# Altium PCB solarInterface.PcbDoc
Units mil, origin at the board's own origin, x right, y up, seen from the top; angles counter-clockwise.
Board outline 4275 x 1970 mil, 2 copper layers (Top Layer, Bottom Layer); 58 components, 46 nets, 174 pads, 35 vias.
Unrouted connection lines stored in the file: 31.
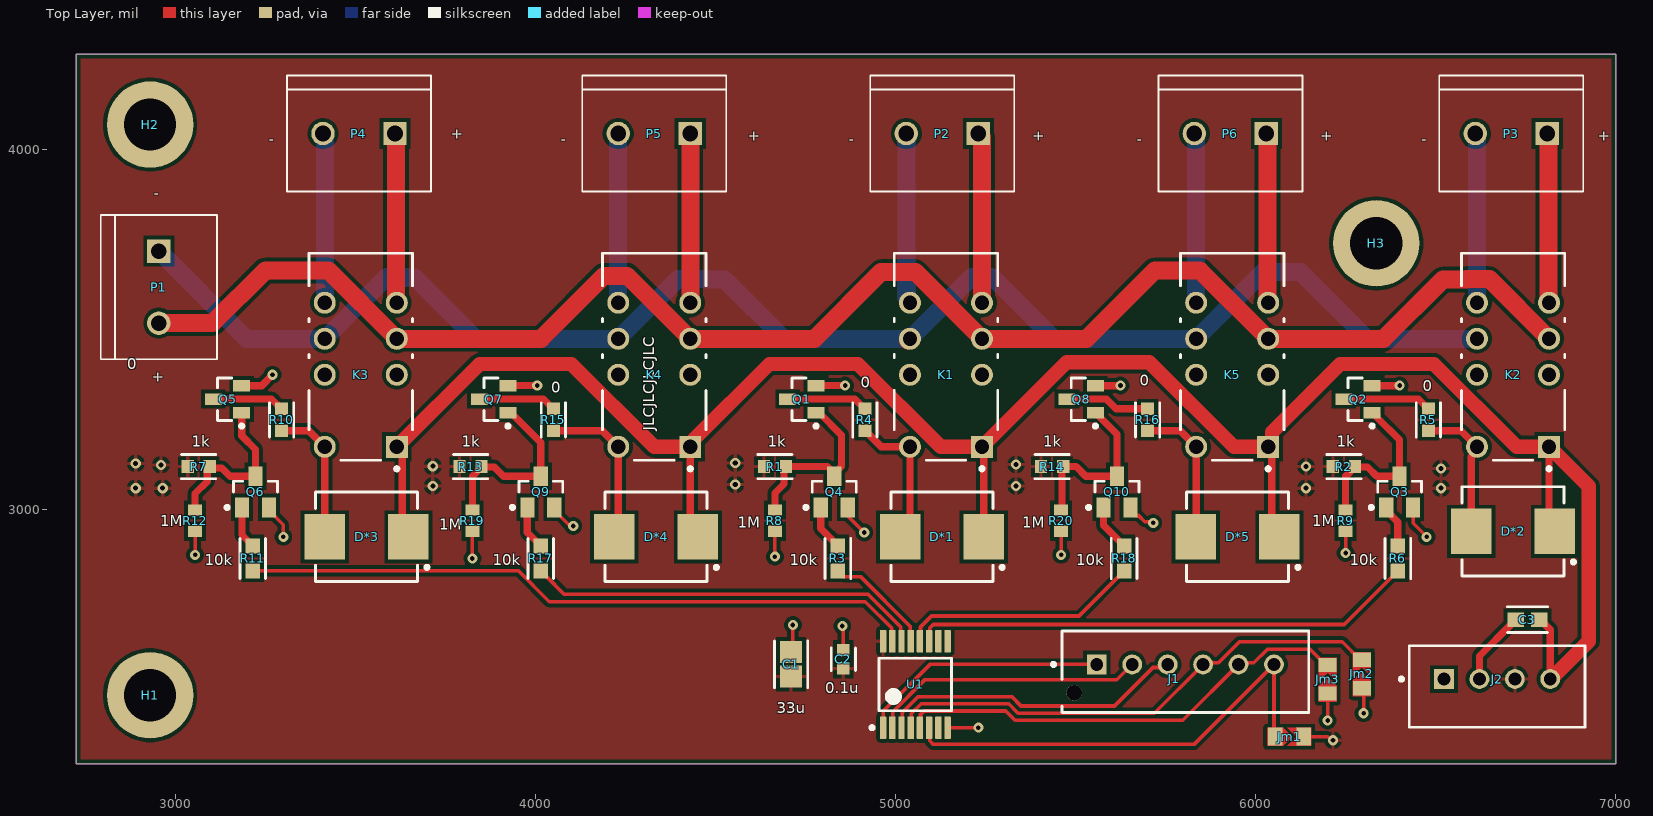
[diagram p0: Top Layer view]
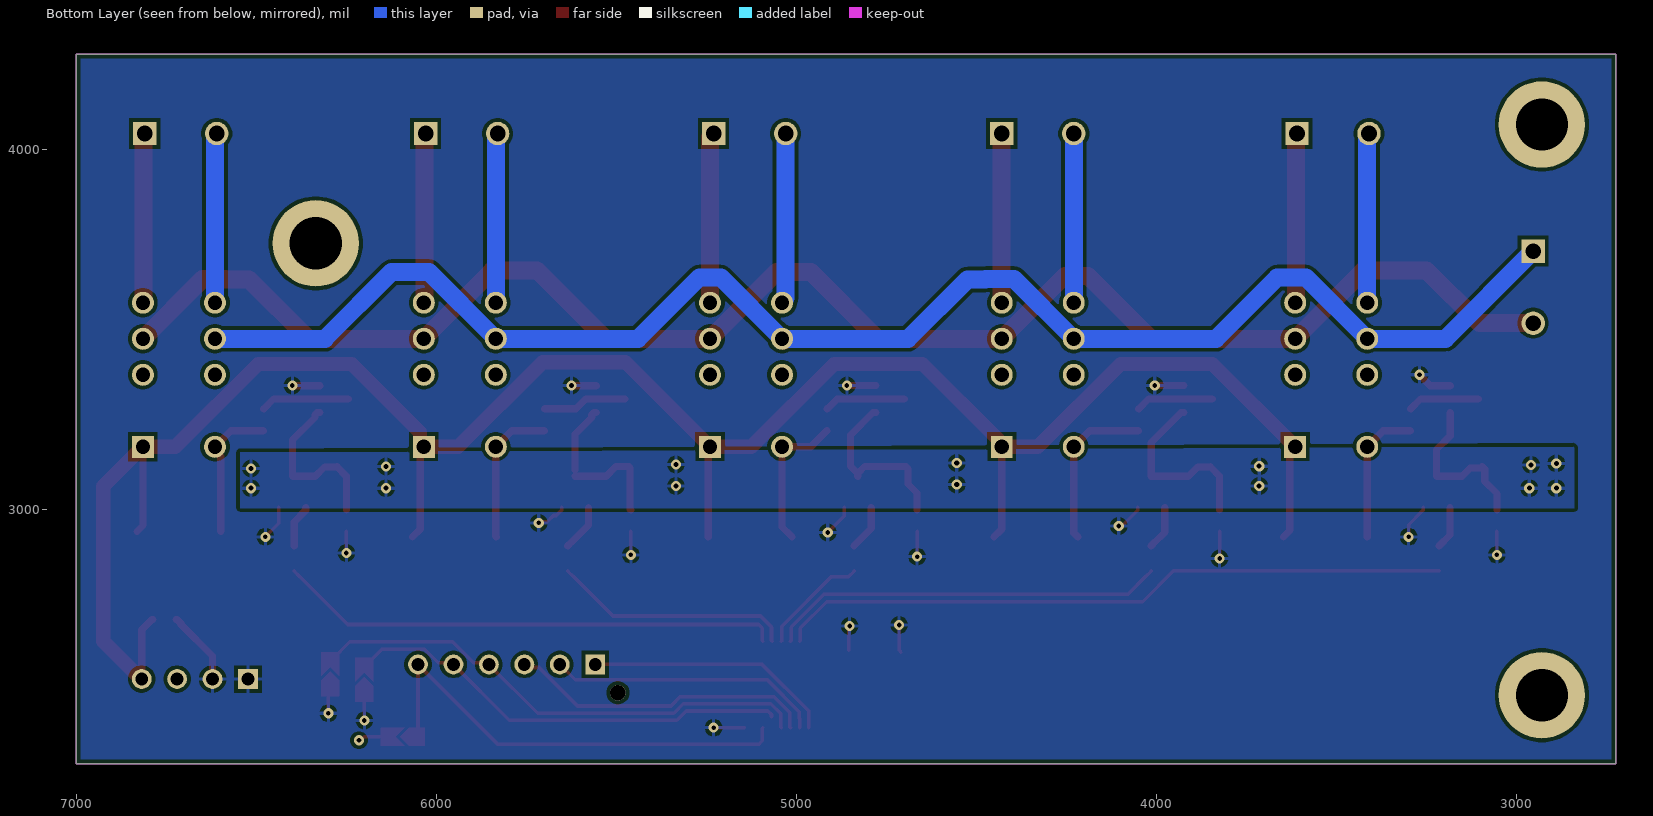
[diagram p1: Bottom Layer view, seen from below]
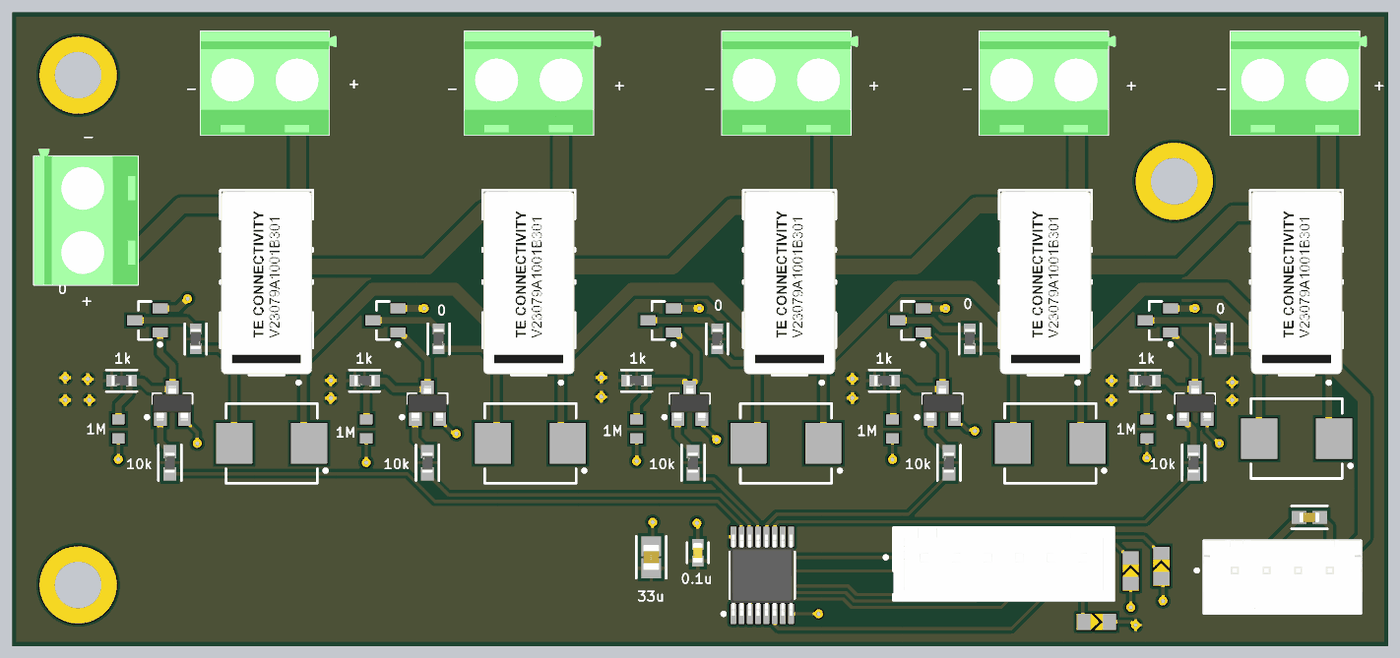
[diagram p2: 3D render of the assembled board from above, using the file's embedded part models]

## Layer stack, top to bottom
Top Solder: solder mask 0.4, Solder Resist, Dk 3.5
Top Layer: signal copper 1.4
Dielectric 1: dielectric 12.6, FR-4, Dk 4.8
Bottom Layer: signal copper 1.4
Bottom Solder: solder mask 0.4, Solder Resist, Dk 3.5

## Board outline
2725,2295 7000,2295 7000,4265 2725,4265

## Design rules (kind name [scope] priority, off if disabled: settings)
Clearance [All] p1: gap=10 ignorepadtopadclearanceinfootprint=TRUE except(0: Arc-Hole Track-Hole SMDPad-Hole THPad-Hole Via-Hole Fill-Hole Poly-Hole Region-Hole Text-Hole)
PolygonConnect [All] p1: connectstyle=Relief reliefconductorwidth=10 reliefentries=4 polygonreliefangle="90 Angle" airgapwidth=10
RoutingVias [All] p1: holewidth=13 width=28 viastyle="Through Hole" minholewidth=7 minwidth=10 maxholewidth=28 maxwidth=50
SolderMaskExpansion [All] p1: expansion=4 istentingtop=FALSE
Width [All] p1: maxlimit=75 minlimit=7 preferedwidth=10 minimp=50.000000 maximp=50.000000 favimp=50.000000
30 further rules are at their usual default settings.

## Components (designator, comment, footprint, x,y, rotation, side; value= is the part's Value field where it differs from the comment)
C1 "33u" FP-C2012-125-0_2-IPC_A 4710,2570.98 r90 top
C2 "0.1u" FP-C0603-CJ-MFG 4855,2585 r90 top value=100nF
C3 "GRM188R71C474KA88D" FP-GRM188-0_1-e0_2_0_5-IPC_A 6755,2695 r180 top
D*1 "Diode" DIOM6959X26M 5128.86,2925 r180 top
D*2 "Diode" DIOM6959X26M 6715,2940 r180 top
D*3 "Diode" DIOM6959X26M 3531.14,2925 r180 top
D*4 "Diode" DIOM6959X26M 4335,2925 r180 top
D*5 "Diode" DIOM6959X26M 5950,2925 r180 top
H1 "Mount_Holes" MountHole-4-40PTH 2930,2485 r90 top
H2 "Mount_Holes" MountHole-4-40PTH 2930,4070 r90 top
H3 "Mount_Holes" MountHole-4-40PTH 6335,3740 r90 top
J1 "B6B-XH-AM(LF)(SN)" FP-B6B-XH-AM_LF_SN-MFG 5805,2550 r180 top
J2 "B4B-XH-A(LF)(SN)" FP-B4B-XH-A_LF_SN-MFG 6670.79,2509.33 r180 top
Jm1 "SolderJumper" bridge 6090,2370 r0 top
Jm2 "SolderJumper" bridge 6295,2540 r90 top
Jm3 "SolderJumper" bridge 6200,2525 r90 top
K1 "V23079A1001B301" FP-V23079A1001B301-MFG 5140,3425 r90 top
K2 "V23079A1001B301" FP-V23079A1001B301-MFG 6715,3425 r90 top
K3 "V23079A1001B301" FP-V23079A1001B301-MFG 3515,3425 r90 top
K4 "V23079A1001B301" FP-V23079A1001B301-MFG 4330,3425 r90 top
K5 "V23079A1001B301" FP-V23079A1001B301-MFG 5935,3425 r90 top
P1 "282837-2" TE_282837-2 2954.22,3618.34 r270 top
P2 "282837-2" TE_282837-2 5130,4045 r180 top
P3 "282837-2" TE_282837-2 6710,4045 r180 top
P4 "282837-2" TE_282837-2 3510,4045 r180 top
P5 "282837-2" TE_282837-2 4330,4045 r180 top
P6 "282837-2" TE_282837-2 5930,4045 r180 top
Q1 "IRLML6344" SOT95P245X110-3N 4740,3307.4 r180 top
Q2 "IRLML6344" SOT95P245X110-3N 6284.37,3307.4 r180 top
Q3 "MMBT3904" FAIR-SOT23-3_V 6400,3050 r90 top
Q4 "MMBT3904" FAIR-SOT23-3_V 4830,3050 r90 top
Q5 "IRLML6344" SOT95P245X110-3N 3145,3307.4 r180 top
Q6 "MMBT3904" FAIR-SOT23-3_V 3222.6,3050 r90 top
Q7 "IRLML6344" SOT95P245X110-3N 3884.37,3307.4 r180 top
Q8 "IRLML6344" SOT95P245X110-3N 5515.63,3307.4 r180 top
Q9 "MMBT3904" FAIR-SOT23-3_V 4015,3050 r90 top
Q10 "MMBT3904" FAIR-SOT23-3_V 5615,3050 r90 top
R1 "1k" FP-RC0603-0_55-IPC_B 4665,3120 r180 top
R2 "1k" FP-RC0603-0_55-IPC_B 6245,3120 r180 top
R3 "10k" FP-RC0603-0_55-IPC_A 4840,2865 r90 top
R4 "0" FP-RC0603-0_55-IPC_B 4915,3250 r270 top
R5 "0" FP-RC0603-0_55-IPC_B 6480,3250 r270 top
R6 "10k" FP-RC0603-0_55-IPC_A 6395,2865 r90 top
R7 "1k" FP-RC0603-0_55-IPC_B 3065,3120 r180 top
R8 "1M" RESC1608X55X25ML10T15 4665,2970 r90 top
R9 "1M" RESC1608X55X25ML10T15 6250,2970 r90 top
R10 "0" FP-RC0603-0_55-IPC_B 3295,3250 r270 top
R11 "10k" FP-RC0603-0_55-IPC_A 3215,2865 r90 top
R12 "1M" RESC1608X55X25ML10T15 3055,2970 r90 top
R13 "1k" FP-RC0603-0_55-IPC_B 3820,3120 r180 top
R14 "1k" FP-RC0603-0_55-IPC_B 5435,3120 r180 top
R15 "0" FP-RC0603-0_55-IPC_B 4050,3250 r270 top
R16 "0" FP-RC0603-0_55-IPC_B 5700,3250 r270 top
R17 "10k" FP-RC0603-0_55-IPC_A 4015,2865 r90 top
R18 "10k" FP-RC0603-0_55-IPC_A 5635,2865 r90 top
R19 "1M" RESC1608X55X25ML10T15 3825,2970 r90 top
R20 "1M" RESC1608X55X25ML10T15 5460,2970 r90 top
U1 "SN74LVC138AQPWRQ1" PW0016A_M 5055,2515 r90 top

## Footprints (in the part's own frame and the unit in brackets; to place one, negate y for a bottom-side part, rotate by r counter-clockwise, add the part's x,y. Pads: shape width x height; smd on the part's side, far side on the other; paste and mask are expansions set on the pad)
bridge [mil]
  rect 40x50 smd: 1(-35,0) 2(44,0)
  Top Layer region: -58,-25 -13,-25 12,0 -13,25 -58,25
  Top Layer region: -2,-25 23,0 -2,25 64,25 64,-25
DIOM6959X26M [mm] "Molded Diode, 2-Leads, Body 6.9x5.9mm, IPC Low Density"
  rect 2.85x3.2 smd: AN(2.95,0) CAT(-2.95,0)
  silkscreen extent -4.38,-3.15 3.6,3.15, body extent -3.55,-3.11 3.56,3.11, height 2.62
FAIR-SOT23-3_V [mm] "SOT23, 3-Leads, Body 3.12x1.5mm, Pitch 0.95mm"
  rect 1.4x1 smd: 1(-1.1,0.95) 2(-1.1,-0.95) 3(1.1,0)
  silkscreen extent -1.22,-1.55 0.75,2.12, body extent -1.35,-1.56 1.35,1.56, height 1.2
FP-B4B-XH-A_LF_SN-MFG [mm]
  rect 1.4x1.4 hole 0.9 paste-1000 mask+0: 1(3.75,-0.525)
  round 1.4 hole 0.9 paste-1000 mask+0: 2(1.25,-0.525) 3(-1.25,-0.525) 4(-3.75,-0.525)
  silkscreen extent -6.2,-2.88 6.87,2.88, body extent -6.3,-2.98 6.3,2.98, height 0.25
FP-B6B-XH-AM_LF_SN-MFG [mm]
  rect 1.4x1.4 hole 0.9 paste-1000 mask+0: 1(6.25,-0.525)
  round 1.4 hole 0.9 paste-1000 mask+0: 2(3.75,-0.525) 3(1.25,-0.525) 4(-1.25,-0.525) 5(-3.75,-0.525) 6(-6.25,-0.525)
  round 1.1 hole 1.1 unplated paste-1000 mask+0: ""(7.85,1.475)
  silkscreen extent -8.7,-2.88 9.42,2.88, body extent -8.8,-2.98 8.8,2.98, height 0.25
FP-C0603-CJ-MFG [mm]
  rect 0.85x0.9 smd paste+0 mask+0: 1(-0.65,0) 2(0.65,0)
  silkscreen extent -0.8,-0.85 0.8,0.85, body extent -1.2,-0.6 1.2,0.6, height 0.25
FP-C2012-125-0_2-IPC_A [mil]
  rect 62.13x61.27 smd paste+0 mask+0: 1(-34.02,0) 2(34.02,0)
  silkscreen extent -65,-46 65,46, body extent -85,-50 85,50, height 10
FP-GRM188-0_1-e0_2_0_5-IPC_A [mil]
  rect 45.62x39.85 smd paste+0 mask+0: 1(-32.55,0) 2(32.55,0)
  silkscreen extent -55,-36 55,36, body extent -75,-40 75,40, height 10
FP-RC0603-0_55-IPC_A [mil]
  rect 41.68x39.85 smd paste+0 mask+0: 1(-34.52,0) 2(34.52,0)
  silkscreen extent -55,-36 55,36, body extent -75,-40 75,40, height 10
FP-RC0603-0_55-IPC_B [mil]
  rect 33.81x35.91 smd paste+0 mask+0: 1(-30.58,0) 2(30.58,0)
  silkscreen extent -47,-34 47,34, body extent -57,-28 57,28, height 10
FP-V23079A1001B301-MFG [mm]
  rect 1.55x1.55 hole 1 paste-1000 mask+0: 1(-6.35,-2.54)
  round 1.55 hole 1 paste-1000 mask+0: 3(-1.27,-2.54) 4(1.27,-2.54) 5(3.81,-2.54) 8(3.81,2.54) 9(1.27,2.54) 10(-1.27,2.54) 12(-6.35,2.54)
  silkscreen extent -8.02,-3.65 7.3,3.65, body extent -7.4,-3.75 7.4,3.75, height 0.25
MountHole-4-40PTH [mil] "#4-40 machine screw PTH mount"
  round 240 hole 145: 0(0,0)
PW0016A_M [mm] "SOP, 16-Leads, Body 5.1x4.5mm, Pitch 0.65mm, IPC Low Density"
  rrect22% 1.6x0.45 smd: 1(-3.05,2.275) 2(-3.05,1.625) 3(-3.05,0.975) 4(-3.05,0.325) 5(-3.05,-0.325) 6(-3.05,-0.975) 7(-3.05,-1.625) 8(-3.05,-2.275) 9(3.05,-2.275) 10(3.05,-1.625) 11(3.05,-0.975) 12(3.05,-0.325) 13(3.05,0.325) 14(3.05,0.975) 15(3.05,1.625) 16(3.05,2.275)
  silkscreen extent -3.17,-2.55 1.85,3.17, body extent -3.21,-2.5 3.21,2.5, height 1
RESC1608X55X25ML10T15 [mm] "Chip Resistor, 2-Leads, Body 1.70x0.90mm, IPC Low Density"
  rect 0.8x1 smd: 1(-0.75,0) 2(0.75,0)
  body extent -0.85,-0.45 0.85,0.45, height 0.55
SOT95P245X110-3N [mm] "SOT23, 3-Leads, Body 2.90x2.45mm, Pitch 0.95mm, IPC Medium Density"
  rect 1.2x0.8 smd: 1(-1,0.95) 2(-1,-0.95) 3(1,0)
  silkscreen extent -1.13,-1.5 0.7,2.02, body extent -0.7,-1.5 0.7,1.5, height 1.1
TE_282837-2 [mm]
  rect 1.65x1.65 / inner round 1.65 / far side rect 1.65x1.65 hole 1.1: 1(-2.54,0)
  round 1.65 hole 1.1: 2(2.54,0)
  silkscreen extent -5.08,-4.1 5.08,4.1, body extent -5.68,-4.1 5.08,4.1, height 10

## Part data
C1: library part CMP-08246-002720-1, "Multilayer Ceramic Capacitors 33μF ±20% 10V X5R SMD 0805 / C2012X5R1A336M125AC", Capacitance=33uF, Case Code (Imperial)=0805, Case Code (Metric)=2012, Dielectric=X5R, Dielectric Material=Ceramic, Max Operating Temperature=85°C, Min Operating Temperature=-55°C, Package Quantity=1, Tolerance=20%, Voltage Rating=10V, Case/Package=0805, Depth=1.25mm, Height=1.25mm, Lead Free="Lead Free", Length=2mm, Mount="Surface Mount", Packaging="Tape and Reel", REACH SVHC="No SVHC", Resistor Type=Ceramic, RoHS Compliant=Yes, Series=C, Termination=SMD/SMT, Thickness=0.057inch, Voltage Rating (DC)=10V, Weight=0.000194oz, Width=0.049inch
C2: library part CMP-2006-03300-2, "CAP CER 0.1UF 50V X7R 0603 / C0603X104K5RACTU", Capacitance=100nF, Manufacturer=Kemet, Manufacturer Part Number=C0603X104K5RACTU, Package=C0603-CJ, Temperature="-55°C to +125°C", Temperature Characteristic=X7R, Temperature Coefficient=15%, Temperature Range High=+125°C, Temperature Range Low=-55°C, Tolerance=10%, Voltage=50V, Automotive=No, Category=Cap, ComponentLink2Description=Datasheet, ComponentLink2URL=https://content.kemet.com/datasheets/KEM_C1013_X7R_FT-CAP_SMD.pdf, Device Class L1="Passive Components", Device Class L2=Capacitors, Device Class L3="Ceramic Capacitors", Digikey Description="CAP CER 0.1UF 50V X7R 0603", Height=0.95mm, Ipc Land Pattern Name=CAPC16080X80, Lead Free=Yes, Material=Ceramic, Mouser Description="Capacitor; Ceramic; Cap 0.1uF; Tol+10%; SMT; Flexible Termination; Vol-Rtg 50V; TR", Octopart=https://octopart.com/c0603x104k5ractu-kemet-9145062, RoHS=TRUE, Voltage Rating=50V
C3: library part CMP-2006-02860-2, "Chip Multilayer Ceramic Capacitors for General Purpose, 0603, 0.47uF, X7R, 15%, 10%, 16V", Capacitance=470nF, Case Code (Imperial)=0603, Case Code (Metric)=1608, Dielectric=X7R, Max Operating Temperature=125°C, Min Operating Temperature=-55°C, Package Quantity=1, Tolerance=10%, Voltage=16V, Case/Package=0603, Depth=0.8mm, Height=0.8mm, Lead Free="Lead Free", Length=1.6mm, Material=Ceramic, Mount="Surface Mount", Number of Pins=2, Packaging="Tape and Reel", REACH SVHC="No SVHC", Termination=SMD/SMT, Thickness=0.035inch, Voltage Rating=16V, Voltage Rating (DC)=16V, Width=0.8mm
D*1 D*2 D*3 D*4 D*5: library part CMP-014-000000-1, Component Type=Standard, Design Item ID=Diode, Pin Count=2, Source=SolarCar.SchLib
J1: library part CMP-17439-000167-1, "CONN HEADER VERT 6POS 2.5MM", Current Rating=3A, Flammability Rating="UL94 V-0", Insulation Color=Natural, Max Operating Temperature=85°C, Min Operating Temperature=-25°C, Voltage Rating=250V, Connector Type=Header, Contact Finish - Mating=TIN, Contact Material=Brass, Contact Plating=Copper, Contact Shape=Square, Contact Type="Male Pin", Fastening Type=Detent, Height=7mm, Insulation Material=Nylon, Length=17.4mm, Mated Stacking Heights=9.8mm, Mount="Through Hole", Number of Pins=6, Number of Poles=6, Number of Positions=6, Number of Rows=1, Packaging=Bulk, Pitch=2.5mm, Series=XH, Shape=Straight, Termination=Press-Fit, Width=5.75mm
J2: library part CMP-17439-000250-1, "CONN HEADER VERT 4POS 2.5MM", Color=Natural, Contact Resistance=20mR, Current Rating=3A, Flammability Rating="UL94 V-0", Housing Color=White, Insulation Resistance=1GR, Max Operating Temperature=85°C, Max Voltage Rating (AC)=250V, Min Operating Temperature=-25°C, Package Quantity=500, Connector Type=Header, Contact Finish - Mating=TIN, Contact Material=Brass, Contact Plating=Tin, Contact Shape=Square, Contact Type="Male Pin", Depth=5.75mm, Fastening Type=Detent, Gender=Male, Housing Material=Polyamide, Insulation Color=Natural, Insulation Material=Nylon, Lead Free="Lead Free", Lead Pitch=2.5mm, Length=12.4mm, Mated Stacking Heights=9.8mm, Material=Polyamide, Max Current Rating=3A, Max Voltage Rating (DC)=250V, Mount="Through Hole", Number of Contacts=4, Number of Positions=4, Number of Rows=1, Orientation=Straight, Packaging=Bulk, Pitch=2.5mm, REACH SVHC="No SVHC", Series=XH, Termination=Solder, Voltage Rating=250V, Voltage Rating (AC)=250V, Wire/Cable Gauge=22AWG
Jm1 Jm2 Jm3: "Solder Configuration Jumper", LatestRevisionDate=17-Jul-2002, LatestRevisionNote="Re-released for DXP Platform.", PackageDescription="Radial Cap, Thru-Hole; 2 Leads; 0.2 in Pin Spacing", PackageReference=RAD-0.2, Published=24-Mar-1999, Publisher="Altium Limited"
K1 K2 K3 K4 K5: library part CMP-03396-000065-1, "RELAY GEN PURPOSE DPDT 2A 5VDC", Ambient Temperature Range High=+85°C, Ambient Temperature Range Low=-40°C, Coil Power=140mW, Coil Resistance=178Ω, Coil Voltage=5V, Current Rating=2A, Manufacturer="TE Connectivity", Switching Current=5A, Switching Power=60W, Automotive=No, Category=Relay, Coil Type=Non-Latching, ComponentLink2Description=Datasheet, ComponentLink2URL=https://www.te.com/commerce/DocumentDelivery/DDEController?Action=showdoc&DocId=Specification+Or+Standard%7F108-98002%7FZ6%7Fpdf%7FEnglish%7FENG_SS_108-98002_Z6.pdf%7F1393788-3, Device Class L1=Electromechanical, Device Class L2=Relays, Device Class L3="Signal Relays", Digikey Description="RELAY GEN PURPOSE DPDT 2A 5VDC", Height=9.9mm, Lead Free=Yes, Manufacturer Part Number=V23079A1001B301, Mouser Description="Electromechanical Relay 5VDC 178Ohm 2A DPDT (( 14.5mm 7.2mm 9.8mm)) THT Signal Relay Automotive Medical", Number of Contacts=2, Octopart=https://octopart.com/v23079a1001b301-te+connectivity-55433324, Package=V23079A1001B301, RoHS=TRUE, Standoff Height=0.4mm, Throw Configuration=DPDT
P1 P2 P3 P4 P5 P6: "Ð Ð°Ð·ÑŠÐµÐ¼Ð½Ñ‹Ðµ ÐºÐ»ÐµÐ¼Ð¼Ð½Ñ‹Ðµ ÐºÐ¾Ð»Ð¾Ð´ÐºÐ¸ Ð Ð¾Ð·ÐµÑ‚ÐºÐ° 2 Ð¿Ð¾Ð»Ð¾Ð¶ÐµÐ½Ð¸Ñ 5,08 Ð¼Ð¼ ÐŸÑ€Ð¸Ð¿Ð¾Ð¹ Ð¿Ñ€ÑÐ¼Ð¾Ð¹ Ñ‡ÐµÑ€ÐµÐ· Ð¾Ñ‚Ð²ÐµÑ€ÑÑ‚Ð¸Ðµ 13,5 Ð / ÐºÐ¾Ð½Ñ‚Ð°ÐºÑ‚", Package=None, Availability="In Stock", Check_prices=https://www.snapeda.com/parts/282837-2/TE+Connectivity+AMP+Connectors/view-part/?ref=eda, MF="TE Connectivity", MP=282837-2, Price=None, Purchase-URL=https://pricing.snapeda.com/search/part/282837-2/?ref=eda, SnapEDA_Link=https://www.snapeda.com/parts/282837-2/TE+Connectivity+AMP+Connectors/view-part/?ref=snap
Q1 Q2 Q5 Q7 Q8: library part CMP-006-0048-1, "IRLML6344 N MOSFET 5.0A", Component Type=Standard, Design Item ID=IRLML6344, Pin Count=3, Source=SolarCar.SchLib
Q3 Q4 Q6 Q9 Q10: library part CMP-014-00026-1, "NPN General Purpose Amplifier, 40 V, 0.2 A, -55 to 150 degC, 3-Pin SOT23, RoHS, Tape and Reel", Case/Package=TO-236-3, Frequency=300MHz, Manufacturer="Fairchild Semiconductor", Max Operating Temperature=150°C, Min Operating Temperature=-55°C, Package Description="3-Pin Small Outline Transistor, Body 2.92 x 1.325 mm, Pitch 0.95 mm", Package Quantity=3000, Package Reference=SOT23-3, Package Version="Rev. 12, 03/2016", Power=625mW, Datasheet URL=https://www.fairchildsemi.com/datasheets/MM/MMBT3904.pdf, Datasheet Version="Rev. 1.1.0, 10/2014", Elements=1, hFE Min=100, Manufacturer URL=https://www.fairchildsemi.com/, Mounting Technology=SM, Package URL=http://www.fairchildsemi.com/dwg/MA/MA03D.pdf, Packaging=TapeandReel, Pins=3, RoHS Compliant=True, Vce Max=300mV
R1 R2 R7 R13 R14: library part CMP-1659-00009-5, "RES 1K OHM 1% 1/10W 0603 / RC0603FR-071KL", Case Code (Imperial)=0603, Case Code (Metric)=1608, Max Operating Temperature=155°C, Max Power Dissipation=100mW, Min Operating Temperature=-55°C, Resistance=1kR, Resistance Tolerance=1%, Resistor Type="Thick Film", Temperature Coefficient=100ppm/°C, Voltage Rating=50V, Case/Package=0603, Construction=Rectangular, Contact Plating=Tin, Depth=0.8mm, Features="Moisture Resistant", Height=0.45mm, Lead Free="Lead Free", Length=1.6mm, Military Standard=Not, Number of Terminations=2, Packaging="Tape and Reel", Power Rating=100mW, Radiation Hardening=No, REACH SVHC="No SVHC", RoHS Compliant=Yes, Series=RC, Size Code=0603, Technology="THICK FILM", Termination=SMD/SMT, Tolerance=1%
R3 R6 R11 R17 R18: library part CMP-2100-03664-2, "RES 10K OHM 1% 1/10W 0603 / RC0603FR-0710KL", Case Code (Imperial)=0603, Case Code (Metric)=1608, Max Operating Temperature=155°C, Max Power Dissipation=100mW, Min Operating Temperature=-55°C, Resistance=10kR, Resistance Tolerance=1%, Resistor Type="Thick Film", Temperature Coefficient=100ppm/°C, Voltage Rating=75V, Voltage Rating (DC)=50V, Case/Package=0603, Construction=Rectangular, Depth=0.8mm, Features="Moisture Resistant", Height=0.45mm, Lead Free="Lead Free", Lead Pitch=0.3mm, Length=1.6mm, Military Standard=Not, Number of Pins=2, Number of Terminations=2, Packaging="Tape and Reel", Power Rating=100mW, RoHS Compliant=Yes, Series=RC, Size Code=0603, Termination=SMD/SMT, Tolerance=1%, Weight=7.1E-05oz, Width=0.8mm
R4 R5 R10 R15 R16: library part CMP-1659-00009-5, "0 OHM 0603", Case Code (Imperial)=0603, Case Code (Metric)=1608, Max Operating Temperature=155°C, Max Power Dissipation=100mW, Min Operating Temperature=-55°C, Resistance=1kR, Resistance Tolerance=1%, Resistor Type="Thick Film", Temperature Coefficient=100ppm/°C, Voltage Rating=50V, Case/Package=0603, Construction=Rectangular, Contact Plating=Tin, Depth=0.8mm, Features="Moisture Resistant", Height=0.45mm, Lead Free="Lead Free", Length=1.6mm, Military Standard=Not, Number of Terminations=2, Packaging="Tape and Reel", Power Rating=100mW, Radiation Hardening=No, REACH SVHC="No SVHC", RoHS Compliant=Yes, Series=RC, Size Code=0603, Technology="THICK FILM", Termination=SMD/SMT, Tolerance=1%
R8 R9 R12 R19 R20: library part CMP-1659-00056-1, "Chip Resistor, 1 MOhm, +/- 1%, 100 mW, -55 to 155 degC, 0603 (1608 Metric), RoHS, Tape and Reel / RC0603FR-071ML", Capacitance="1 mF", Case\Package=Radial, Max Operating Temperature="85 degC", Min Operating Temperature="-40 degC", Package Quantity=200, Tolerance=20%, Voltage Rating="25 V", ComponentLink1Description="Manufacturer URL", ComponentLink1URL=http://www.yageo.com/, ComponentLink2Description=Datasheet, ComponentLink2URL=http://www.yageo.com/documents/recent/PYu-RC_Group_51_RoHS_L_04.pdf, DatasheetVersion="Rev. 4, 02/2016", Diameter="10 mm", Height="20 mm", Lead Pitch="5 mm", Length="20 mm", Mount="Through Hole", PackageDescription="2-Pin Surface Mount Device, Body 1.6 x 0.8 mm", PackageReference=0603, Packaging=Bulk, Radiation Hardening=No, REACH SVHC="No SVHC", RoHSCompliant=true, Voltage Rating (DC)="25 V", Width="0 inch"
U1: library part CMP-1628-00027-2, "Automotive Catalog 3-Line To 8-Line decoder/Demultiplexer, PW0016A, LARGE T&R", F @ Nom Voltage(Max)(Mhz)=100, Generic Part Number=SN74LVC138A-Q1, ICC @ Nom Voltage(Max)(mA)=0.01, Manufacturer="Texas Instruments", Operating Temperature Range(C)="-40 to 125", Rating=Automotive, tpd @ Nom Voltage(Max)(ns)=7.9,6.7, Voltage(Nom)(V)=2.7,3.3, Bits(#)=8, Channels(#)=1, Code_JEDEC=MO-153, DatasheetVersion=SCAS708B, Input Type=TLL/CMOS, Output Drive (IOL/IOH)(Max)(mA)=24/-24, Output Type=CMOS, PackageReference=PW0016A, Schmitt Trigger=No, Technology Family=LVC, Type=Standard, VCC(Max)(V)=3.6, VCC(Min)(V)=2

## Via types
v1: diameter 28, hole 13, Top Layer to Bottom Layer, 21 vias
v2: diameter 28, hole 14, Top Layer to Bottom Layer, 14 vias

## Nets (pads, with @x,y where several pads share a name; then routed paths per layer and width w, separated by ;. In a path a pad name is that pad's centre, name@x,y a point inside that pad or via, vN(x,y) a via of type N, cw(c..) or ccw(c..) an arc to the next point about the centre after c; other vN are vias at no path point)
3v3: C1.1 C2.1 J2.3 Jm1.2 R1.2 R2.2 R7.2 R13.2 R14.2 U1.16 | length 85.1
  Top Layer w10: Jm1.2 6200.13,2370 6210.13,2360 v1(6215,2360)
  other v2: 2890,3060 2965,3060 6140,3060 6515,3060 3715,3066.09 5335,3066.09 4555,3070 6515,3115 6140,3120 3715,3121.09 2960,3125 5335,3126.09 2890.01,3129.06 4555,3130
5V: C3.1 D*1.CAT D*2.CAT D*3.CAT D*4.CAT D*5.CAT J2.4 K1.1 K2.1 K3.1 K4.1 K5.1 | length 6190.1
  Top Layer w20: K3.1 3630,3160 3630,2942.28 D*3.CAT ; K4.1 4430,2946.14 D*4.CAT ; K1.1 5245,3170 D*1.CAT ; K5.1 6045,3165 6045,2946.14 D*5.CAT ; C3.1 6790.43,2695 6818.43,2667.01 J2.4 ; K2.1 6815,2956.14 D*2.CAT
  Top Layer w40: K3.1 3845,3405 4099.74,3405 4329.74,3175 K4.1 4440.51,3185.51 4440.51,3195.51 4650,3405 4895.58,3405 5125.58,3175 K1.1 5475,3410 5705,3410 5940,3175 K5.1 6045.51,3185.51 6045.51,3215.51 6235,3405 6495,3405 6725,3175 K2.1 6925,3065 6925,2635 J2.4@6814.27,2524.27
cell_1: R17.1 U1.14 | length 1105.1
  Top Layer w10: R17.1 4015,2829.57 4029.92,2814.64 4030.84,2814.64 4080.48,2765 4924.22,2765 5014.88,2674.34 5014.88,2636.81 U1.14
cell_2: R3.1 U1.13 | length 307.2
  Top Layer w10: R3.1 4840,2829.57 4854.92,2814.64 4902.86,2814.64 5040.47,2677.03 5040.47,2636.81 U1.13
cell_3: R18.1 U1.12 | length 670.7
  Top Layer w10: U1.12 5069.53,2636.81 5069.53,2674.34 5100.19,2705 5509.52,2705 5619.16,2814.64 5620.08,2814.64 5635,2829.57 R18.1
cell_4: R6.1 U1.11 | length 1403.5
  Top Layer w10: U1.11 5095.12,2636.81 5095.12,2671.65 5105.05,2681.57 6246.09,2681.57 6379.16,2814.64 6380.08,2814.64 6395,2829.57 R6.1
cell_ref: R11.1 U1.15 | length 1877.4
  Top Layer w10: R11.1 3953.02,2830.48 4038.51,2745 4915.94,2745 4989.29,2671.65 4989.29,2636.81 U1.15
NetD*1_CAT: D*1.AN K1.12 R4.2 | length 404.7
  Top Layer w20: R4.2 4916.05,3219.42 4960.47,3175 K1.12 5040,2952.28 D*1.AN
NetD*2_CAT: D*2.AN K2.12 R5.2 | length 395.1
  Top Layer w20: R5.2 6570.58,3219.42 K2.12 6615,3163.9 6598.86,3147.76 D*2.AN
NetD*3_CAT: D*3.AN K3.12 R10.2 | length 388.4
  Top Layer w20: R10.2 3370.58,3219.42 K3.12 D*3.AN
NetD*4_CAT: D*4.AN K4.12 R15.2 | length 453
  Top Layer w20: R15.2 4185.58,3219.42 K4.12 4230,2936.14 D*4.AN
NetD*5_CAT: D*5.AN K5.12 R16.2 | length 403.9
  Top Layer w20: R16.2 5790.58,3219.42 K5.12 5835,2926.14 D*5.AN
NetK1_5: K1.5 P2.1 | length 474.1
  Top Layer w50: P2.1 5240,4035 K1.5
NetK1_8: K1.8 P2.2 | length 474.1
  Bottom Layer w50: P2.2 5030,3587.98 5040,3577.98 K1.8
NetK2_5: K2.5 P3.1 | length 472.1
  Top Layer w50: P3.1 6812.89,4042.11 6812.89,3577.11 K2.5
NetK2_8: K2.8 P3.2 | length 472.1
  Bottom Layer w50: P3.2 6610,4040.95 6615,4035.95 K2.8
NetK3_5: K3.5 P4.1 | length 472.1
  Top Layer w50: P4.1 3612.89,4042.11 3612.89,3577.11 K3.5
NetK3_8: K3.8 P4.2 | length 472.1
  Bottom Layer w50: P4.2 3410,4040.95 3415,4035.95 K3.8
NetK4_5: K4.5 P5.1 | length 470
  Top Layer w50: K4.5 P5.1
NetK4_8: K4.8 P5.2 | length 470
  Bottom Layer w50: K4.8 P5.2
NetK5_5: K5.5 P6.1 | length 472.1
  Top Layer w50: P6.1 6032.89,4042.11 6032.89,3577.11 K5.5
NetK5_8: K5.8 P6.2 | length 472.1
  Bottom Layer w50: P6.2 5830,4040.95 5835,4035.95 K5.8
NetQ1_1: Q1.1 Q4.3 R1.1 R8.2 | length 494.2
  Top Layer w20: R8.2 4665,3046.82 4690.22,3072.04 4690.22,3114.64 R1.1 4811.18,3120 Q4.3@4830,3101.18 ; Q1.1 4787.24,3270 4850,3207.24 4850,3121.18 Q4.3@4830,3101.18 ; Q4.3 Q4.3@4830,3101.18
NetQ1_3: Q1.3 R4.1 | length 225.5
  Top Layer w20: Q1.3 4887.13,3307.4 4913.95,3280.58 R4.1
NetQ2_1: Q2.1 Q3.3 R2.1 R9.2 | length 479.4
  Top Layer w20: R9.2 6250,3093.37 6275.58,3118.95 R2.1 6276.35,3119.23 6310.77,3119.23 6336.69,3093.31 Q3.3 6400,3193.74 6337.36,3256.38 6337.36,3264.25 6331.61,3270 Q2.1
NetQ2_3: Q2.3 R5.1 | length 246.1
  Top Layer w20: Q2.3 6452.13,3307.4 6478.95,3280.58 R5.1
NetQ3_1: Q3.1 R6.2 | length 120.6
  Top Layer w20: Q3.1 6362.6,2998.82 6395,2966.42 R6.2
NetQ4_1: Q4.1 R3.2 | length 126.8
  Top Layer w20: Q4.1 4792.6,2947.83 4840,2900.43 R3.2
NetQ5_1: Q5.1 Q6.3 R7.1 R12.2 | length 467.9
  Top Layer w20: R12.2 3055,3045.28 3088.68,3078.95 3088.68,3113.1 R7.1 3099.51,3116.07 3128.93,3116.07 3151.69,3093.31 Q6.3 3222.6,3167.4 3184.37,3205.63 Q5.1
NetQ5_3: Q5.3 R10.1 | length 200.5
  Top Layer w20: Q5.3 3267.13,3307.4 3293.95,3280.58 R10.1
NetQ6_1: Q6.1 R11.2 | length 119.5
  Top Layer w20: Q6.1 3185.2,2930.24 3215,2900.43 R11.2
NetQ7_1: Q7.1 Q9.3 R13.1 R19.2 | length 525.7
  Top Layer w20: R19.2 3825,3093.37 3850.58,3118.95 R13.1 3851.35,3119.23 3885.77,3119.23 3911.69,3093.31 Q9.3 4015,3186.61 3931.61,3270 Q7.1
NetQ7_3: Q7.3 R15.1 | length 216.1
  Top Layer w20: Q7.3 4022.13,3307.4 4048.95,3280.58 R15.1
NetQ8_1: Q8.1 Q10.3 R14.1 R20.2 | length 471.9
  Top Layer w20: R20.2 5462.27,3001.8 5462.27,3116.69 R14.1 5501.61,3120 5528.31,3093.31 Q10.3 ; Q8.1 5562.87,3270 5568.62,3264.25 5568.62,3256.38 5615,3210 Q10.3@5615,3110.87
NetQ8_3: Q8.3 R16.1 | length 234.9
  Top Layer w20: Q8.3 5585.25,3307.4 5612.08,3280.58 R16.1
NetQ9_1: Q9.1 R17.2 | length 123.2
  Top Layer w20: Q9.1 3977.6,2936.92 4004.16,2910.36 4005.08,2910.36 4015,2900.43 R17.2
NetQ10_1: Q10.1 R18.2 | length 131.5
  Top Layer w20: Q10.1 5577.6,2956.92 5624.16,2910.36 5625.08,2910.36 5635,2900.43 R18.2
RTN: C1.2 C2.2 C3.2 J2.1 J2.2 Jm2.1 Jm3.1 Q1.2 Q2.2 Q3.2 Q4.2 Q5.2 Q6.2 Q7.2 Q8.2 Q9.2 Q10.2 R8.1 R9.1 R12.1 R19.1 R20.1 U1.8 | length 1778.8
  Top Layer w10: v1(3055,2875) R12.1 ; Q6.2 3260,2998.82 3300,2958.82 v1(3300,2925) ; v1(3825,2865) R19.1 ; Q7.2 Q7.2@3923.94,3345 ; Q9.2 4052.4,2998.82 4092.78,2958.44 4101.56,2958.44 v1(4105,2955) ; v1(4665,2870) R8.1 ; C1.2 4715,2610 v1(4715,2680) ; Q1.2 Q1.2@4779.57,3345 ; v1(4852.33,2677.41) 4855,2674.73 C2.2 ; Q4.2 4867.4,2982.69 v1(4913.29,2936.8) ; U1.8 5144.65,2395 v1(5230,2395) ; v1(5460,2875) R20.1 ; v1@5624.8,3344.8 v1(5625,3345) ; Q10.2 5652.4,2998.82 5667.09,2984.13 5674.96,2984.13 5692.01,2967.08 5712.27,2967.08 v1(5715.71,2963.64) ; v1(6200,2415) Jm3.1 ; v1(6250,2880) R9.1 ; Jm2.1 6300,2500 v1(6300,2435) ; v1@6399.8,3344.8 v1(6400,3345) ; Q3.2 6437.4,2962.6 v1(6475,2925)
  Top Layer w20: Q5.2 3239.8,3344.8 v1(3270,3375) ; Q7.2@3923.94,3345 v1(4005,3345) ; Q1.2@4779.57,3345 v1(4860,3345) ; Q8.2 v1@5624.8,3344.8 ; Q2.2 v1@6399.8,3344.8 ; J2.2 6621.57,2594.12 6709.64,2682.19 6709.64,2685.08 6719.57,2695 C3.2
SELEC_A: J1.1 U1.1 | length 693
  Top Layer w10: U1.1 4966.32,2395.81 4966.32,2441.42 5095.57,2570.67 J1.1
SELEC_B: J1.2 U1.2 | length 764.7
  Top Layer w10: U1.2 4991.02,2419.68 4992.76,2421.42 4992.76,2439.57 5081.77,2528.58 5511.13,2528.58 5511.6,2528.11 5614.8,2528.11 J1.2
SELEC_C: J1.3 U1.3 | length 857.2
  Top Layer w10: U1.3 5018.35,2396.65 5018.35,2436.88 5062.89,2481.42 5322.47,2481.42 5348.61,2455.28 5608.18,2455.28 5714.95,2562.04 5747.15,2562.04 J1.3
SELEC_G1: J1.6 Jm1.1 U1.6 | length 1291.7
  Top Layer w10: U1.6 5095.12,2393.19 5095.12,2358.35 5105.05,2348.43 5828.82,2348.43 J1.6 6051.06,2373.94 Jm1.1
SELEC_G2A: J1.4 Jm2.2 U1.4 | length 1415.5
  Top Layer w10: U1.4 5043.94,2396.65 5043.94,2434.18 5071.17,2461.42 5314.18,2461.42 5340.32,2435.28 5718.82,2435.28 J1.4 5858.53,2574.99 5896.77,2574.99 5955.01,2633.23 6240.77,2633.23 6290,2584 Jm2.2
SELEC_G2B: J1.5 Jm3.2 U1.5 | length 1252.2
  Top Layer w10: U1.5@5069.53,2425 5069.53,2431.49 5079.46,2441.42 5305.9,2441.42 5332.04,2415.28 5797.24,2415.28 J1.5 5956.96,2574.99 5995.2,2574.99 6033.43,2613.23 6150.77,2613.23 6195,2569 Jm3.2
SMU_NEG: K1.9 K2.9 K3.9 K4.9 K5.9 P1.1 | length 4340.7
  Top Layer w50: K1.9@5035,3470 K1.9
  Bottom Layer w50: P1.1 3197.56,3475 K3.9 3585,3645 3665,3645 3835,3475 K4.9 4395.51,3640.51 4474.49,3640.51 4475,3640 4525,3640 4690,3475 K1.9 5210,3645 5270,3645 5440,3475 K5.9 6020,3660 6125,3660 6310,3475 K2.9
SMU_POS: K1.4 K2.4 K3.4 K4.4 K5.4 P1.2 | length 4593
  Top Layer w50: P1.2 3103.34,3518.34 3250,3665 3425,3665 K3.4 4015,3475 4190,3650 4255,3650 K4.4 4775,3475 4960,3660 5055,3660 K1.4 5530,3475 5720,3665 5845,3665 K5.4 6355,3475 6520,3640 6585,3640 6585.51,3640.51 6649.49,3640.51 K2.4
pads on no net: H1.0 H2.0 H3.0 J1. K1.3 K1.10 K2.3 K2.10 K3.3 K3.10 K4.3 K4.10 K5.3 K5.10 U1.7 U1.9 U1.10

## Polygon pours and split planes (outlines as drawn)
3v3 on Bottom Layer "3V3_L02_P003" (solid, pour order 3): 2840,3175.41 2840,3005 6545,3005 6545,3159.6
RTN on Bottom Layer "RTN_L02_P005" (solid, remove dead copper, pour order 5): 2725,4265 2725,2295 7000,2295 7000,4265
3v3 on Top Layer "3V3_L01_P004" (solid, remove dead copper, pour order 4): 7000,4265 7000,2295 2725,2295 2725,4265

## Keep-outs
Keep-Out Layer:
  the board outline again, w5

## Silkscreen, mask and mechanical layers (free items; w line width, h text height)
Top Overlay:
  text "+" at 3765,4030 h30
  text "+" at 4590,4025 h30
  text "+" at 5380,4025 h30
  text "+" at 6180,4025 h30
  text "+" at 6950,4025 h30
  text "-" at 3260,4015 h30
  text "-" at 4070,4015 h30
  text "-" at 4870,4015 h30
  text "-" at 5670,4015 h30
  text "-" at 6460,4015 h30
  text "-" at 2940,3865 h30
  text "+" at 2935,3355 h30
  text "JLCJLCJLCJLC" at 4330,3220 h30 r90